# Altium PCB 1551KBK.PcbDoc
Units mm, origin at the board's own origin, x right, y up, seen from the top; angles counter-clockwise.
Board outline 61.5 x 34 mm, 2 copper layers (Top Layer, Bottom Layer); 34 components, 27 nets, 115 pads, 58 vias.
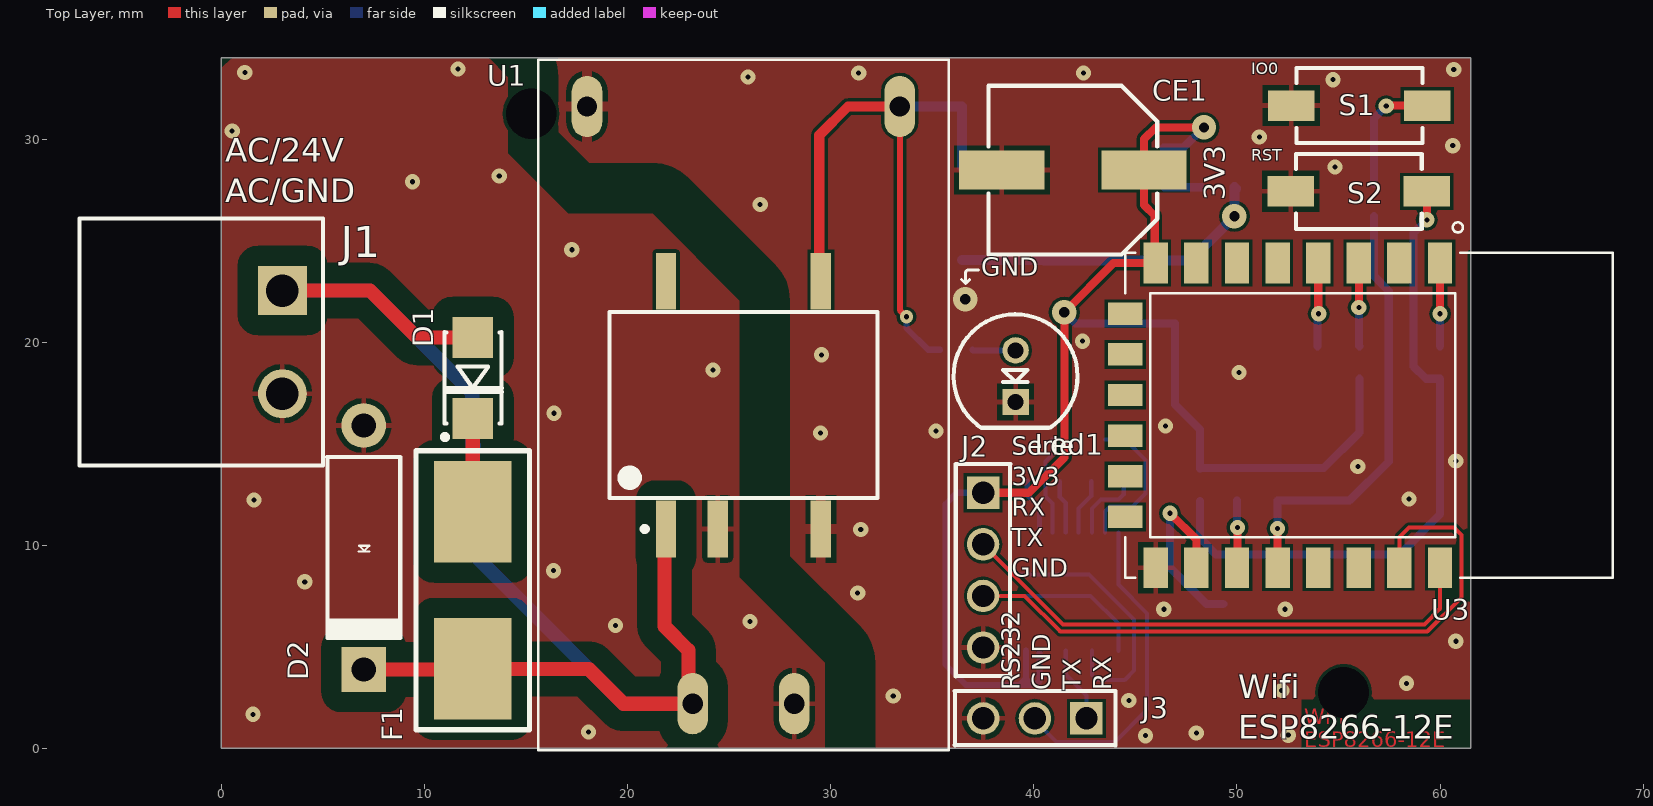
[diagram p0: Top Layer view]
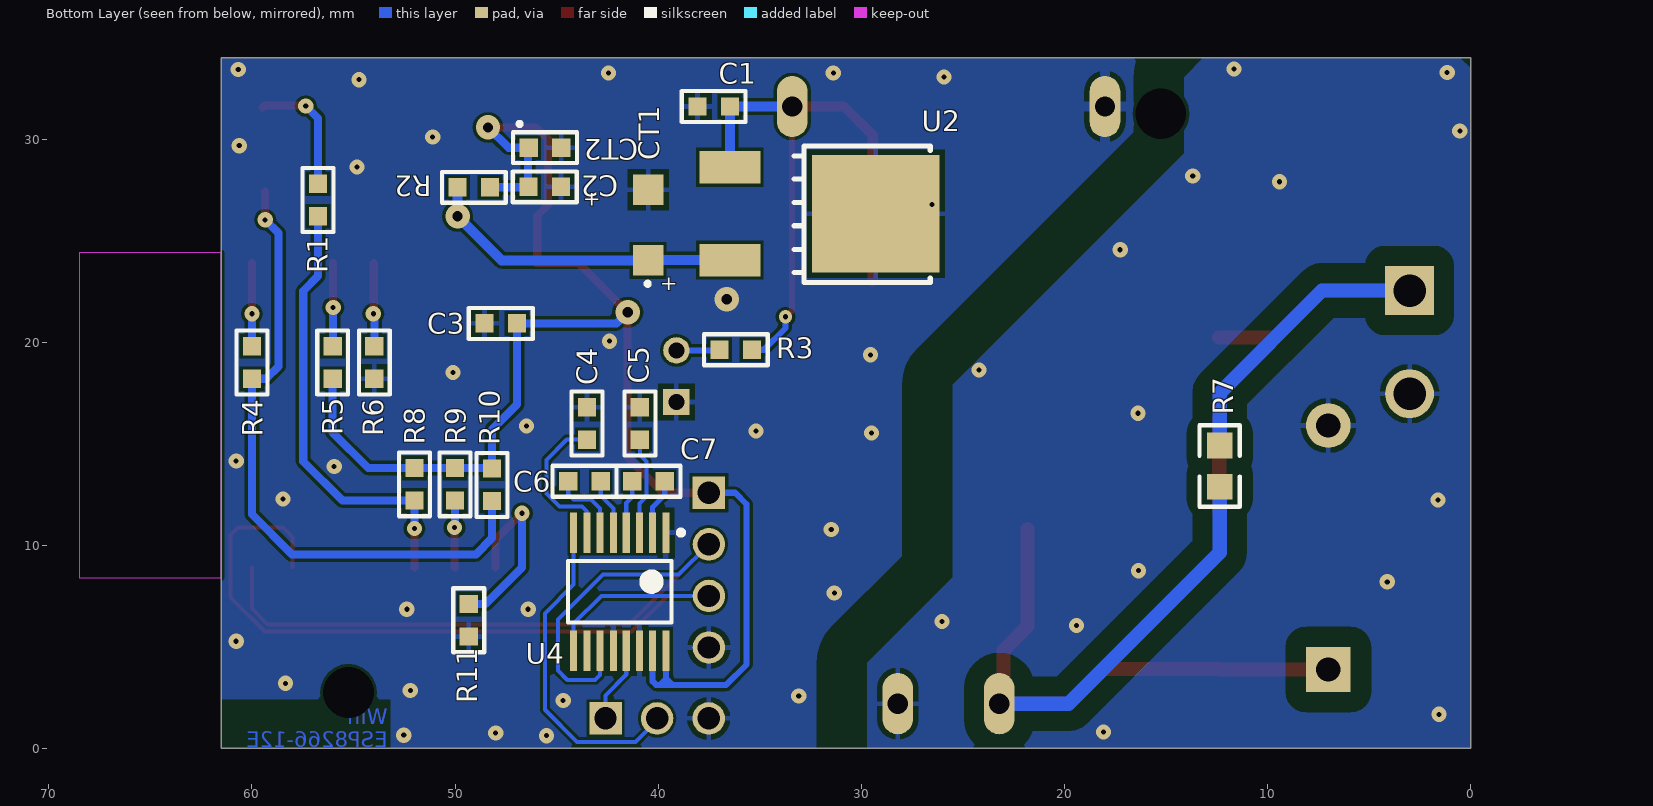
[diagram p1: Bottom Layer view, seen from below]
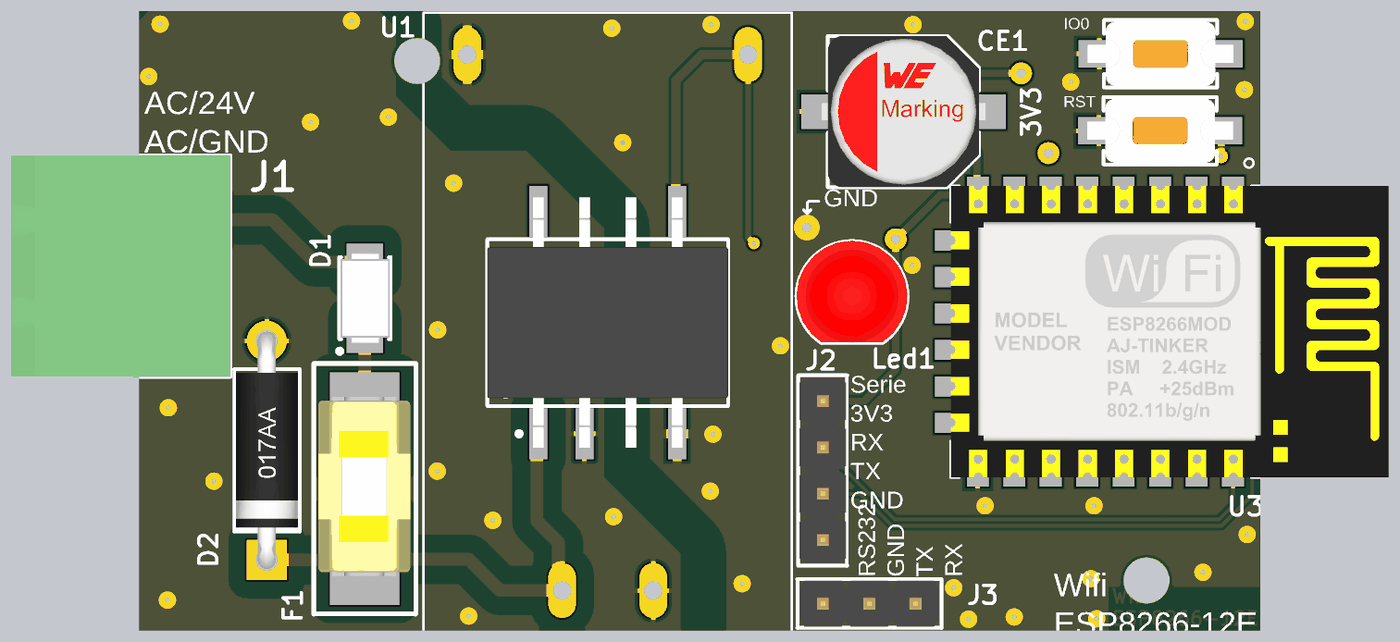
[diagram p2: 3D render of the assembled board from above, using the file's embedded part models]
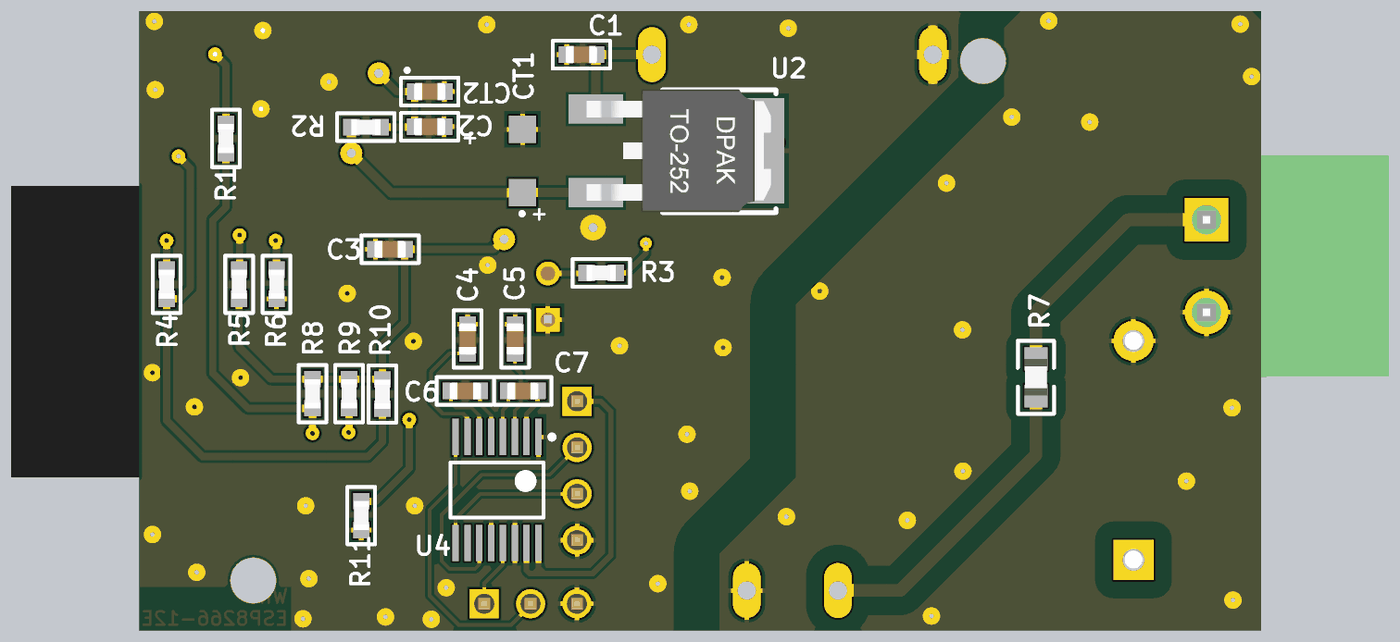
[diagram p3: 3D render of the assembled board from below, using the file's embedded part models]

## Layer stack, top to bottom
Top Solder: solder mask 0.0102, Solder Resist, Dk 3.5
Top Layer: signal copper 0.0356
Dielectric 1: dielectric 0.32, FR-4, Dk 4.8
Bottom Layer: signal copper 0.0356
Bottom Solder: solder mask 0.0102, Solder Resist, Dk 3.5

## Board outline
0,0 61.5,0 61.5,34 0,34

## Design rules (kind name [scope] priority, off if disabled: settings)
Clearance Clearance_GND [InNet('NetD2_A') vs InNet('GND')] p1: gap=2.5 ignorepadtopadclearanceinfootprint=FALSE
Clearance Vin_clearence [(InNet('NetD1_A')OR InNet('NetD1_C') OR InNet('NetD2_C')) vs InNet('NetD2_A')] p2: gap=1 ignorepadtopadclearanceinfootprint=FALSE
Clearance [All] p3: gap=0.15 ignorepadtopadclearanceinfootprint=FALSE
ComponentClearance [All] p1: gap=0 collisioncheckmode=3 verticalgap=0.254 showdistances=FALSE
HoleToHoleClearance [All] p1: gap=0.05 allowstackedmicrovias=TRUE
MinimumSolderMaskSliver [All] p1: minsoldermaskwidth=0.05
PlaneConnect [All] p1: pad.planeconnectstyle=Relief pad.reliefexpansion=0.508 pad.reliefentries=4 pad.reliefconductorwidth=0.254 pad.reliefairgap=0.254 via.planeconnectstyle=Direct via.reliefexpansion=0.508 via.reliefentries=4 via.reliefconductorwidth=0.254 via.reliefairgap=0.254
PolygonConnect PolygonConnect_1 [InComponent('U1') vs InNet('GND')] p1: connectstyle=Relief reliefconductorwidth=0.5 reliefentries=4 polygonreliefangle="90 Angle" airgapwidth=0.254
PolygonConnect [All] p2: thpad.connectstyle=Relief thpad.reliefconductorwidth=0.254 thpad.reliefentries=4 thpad.polygonreliefangle="90 Angle" thpad.airgapwidth=0.254 smdpad.connectstyle=Relief smdpad.reliefconductorwidth=0.254 smdpad.reliefentries=4 smdpad.polygonreliefangle="90 Angle" smdpad.airgapwidth=0.254 via.connectstyle=Direct via.reliefconductorwidth=0.254 via.reliefentries=4 via.polygonreliefangle="90 Angle" via.airgapwidth=0.254
RoomDefinition Supply [InComponentClass('Supply')] p1: confinementstyle=ConfineIn formatcopy=TRUE lockcomponents=FALSE outline -7.975,-4.8 71.475,-4.8 71.475,38.075 -7.975,38.075
RoomDefinition RS232 [InComponentClass('RS232')] p2: confinementstyle=ConfineIn formatcopy=TRUE lockcomponents=FALSE outline -7.975,-4.8 70.75,-4.8 70.75,38.975 -7.975,38.975
RoomDefinition "ESP 12E/F" [InComponentClass('ESP 12E/F')] p3: confinementstyle=ConfineIn formatcopy=TRUE lockcomponents=FALSE outline -7.975,-4.8 70.125,-4.8 70.125,40.025 -7.975,40.025
RoutingVias [All] p1: holewidth=0.4 width=1 viastyle="Through Hole" minholewidth=0.25 minwidth=0.6 maxholewidth=1.5 maxwidth=5
SilkToSilkClearance [All] p1: silktosilkclearance=0
SilkToSolderMaskClearance [IsPad] p1: minsilkscreentomaskgap=0 clearancetoexposedcopper=TRUE
SolderMaskExpansion [All] p1: expansion=0.102
Width [All] p1: maxlimit=1.5 minlimit=0.15 preferedwidth=0.2 minimp=50.000000 maximp=50.000000 favimp=50.000000
24 further rules are at their usual default settings.

## Classes and differential pairs
component class Supply: C1 CT1 D1 D2 F1 J1 Led1 R2 R3 R7 U1 U2
component class RS232: C3 C4 C5 C6 C7 J2 J3 U4
component class "ESP 12E/F": C2 CE1 CT2 R1 R4 R5 R6 R8 R9 R10 R11 S1 S2 U3

## Components (designator, comment, footprint, x,y, rotation, side; value= is the part's Value field where it differs from the comment)
C1 "Ceramic Capacitor" 0603C 37.265,31.6 r270 bottom value=0.1uF
C2 "Ceramic Capacitor" 0603C 45.585,27.65 r90 bottom value=0.1uF (schematic designator C7)
C3 "Ceramic Capacitor" 0603C 47.75,20.925 r270 bottom value=0.1uF (schematic designator C6)
C4 "Ceramic Capacitor" 0603C 43.5,16 r0 bottom value=0.1uF (schematic designator C5)
C5 "Ceramic Capacitor" 0603C 40.9,16 r0 bottom value=0.1uF (schematic designator C4)
C6 "Ceramic Capacitor" 0603C 43.625,13.15 r270 bottom value=0.1uF (schematic designator C3)
C7 "Ceramic Capacitor" 0603C 40.475,13.15 r270 bottom value=0.1uF (schematic designator C2)
CE1 "Eletrolitic Capacitor" WCAP-AS5H_8x10.5 41.925,28.475 r0 top value=1000uF
CT1 "Tantalum capacitor" 1206T 40.491,25.775 r90 bottom value=2.2uF
CT2 "Tantalum capacitor" 0603T 45.575,29.575 r90 bottom value=1uF
D1 "DNP" DO-214AC 12.375,18.25 r90 top value=BYG21M
D2 "DNP" 1N5359BG 7,9.9 r90 top value=1N
F1 "DNP" Fuseholder154 12.375,7.9 r270 top value=0154.V24.0.315A
J1 "Conector" 691313510002 -1,20 r270 top
J2 "Conector" 61300411121 37.5,8.775 r270 top value=4
J3 "Conector" 61300311121 40.05,1.475 r180 top value=3
Led1 "Led" LED_5MM_RED_1C-2A 39.1,18.325 r270 top
R1 "Res" 0603 56.75,27 r0 bottom value=470R (schematic designator R9)
R2 "Res" 0603 49.075,27.625 r90 bottom value=0R1
R3 "Res" 0603 36.175,19.625 r90 bottom value=470R
R4 "Res" 0603 60,19 r0 bottom value=470R (schematic designator R5)
R5 "Res" 0603 56.025,19 r0 bottom value=10k (schematic designator R6)
R6 "Res" 0603 53.975,19 r180 bottom value=10k (schematic designator R10)
R7 "Res" 0805 12.35,13.9 r180 bottom value=0R0 (schematic designator R1)
R8 "Res" 0603 52,13 r180 bottom value=10k (schematic designator R7)
R9 "Res" 0603 50,13 r180 bottom value=10k (schematic designator R8)
R10 "Res" 0603 48.175,12.975 r0 bottom value=10k (schematic designator R4)
R11 "Res" 0603 49.327,6.309 r0 bottom value=10k
S1 "Swich" 434121043816 56.025,31.65 r0 top value=434121043816 (schematic designator S2)
S2 "Swich" 434121043816 56,27.425 r0 top value=434121043816 (schematic designator S1)
U1 "HLK-PM01" HLK-PM01/ISE 25.7,16.9 r90 top
U2 "LDO" "DPAK-TO-252-3, CASE369C" 32.875,26.325 r0 bottom value=LF33ABDT-TR
U3 "ESP8266-12E/ESP-12E" XCVR_ESP8266-12E/ESP-12E 53,16.4 r270 top (schematic designator U4)
U4 "RS232 Serie CI" TI-PW16_M 41.875,7.7 r270 bottom value=MAX3221IPW (schematic designator U3)

## Footprints (in the part's own frame and the unit in brackets; to place one, negate y for a bottom-side part, rotate by r counter-clockwise, add the part's x,y. Pads: shape width x height; smd on the part's side, far side on the other; paste and mask are expansions set on the pad)
1N5359BG [mm] "Dip zener Diode"
  round 2.2 hole 1.2: A(5.994,0)
  rect 2.2x2.2 hole 1.2: C(-6.02,0)
  silkscreen extent -4.56,-1.82 4.44,1.8, body extent -6.5,-1.7 6.5,1.7, height 3.5
0603 [mm] "Resistencia"
  rect 0.9x0.9 smd: 1(0,0.8) 2(0,-0.8)
  silkscreen extent -0.76,-1.57 0.76,1.57, body extent -0.43,-0.8 0.43,0.8, height 0.48
0603C [mm] "Condensador Ceramico"
  rect 0.9x0.9 smd: 1(0,0.8) 2(0,-0.8)
  silkscreen extent -0.76,-1.57 0.76,1.57, body extent -0.47,-0.88 0.48,0.87, height 0.85
0603T [mm] "Condensador Ceramico"
  rect 0.9x0.9 smd: 1(0,0.8) 2(0,-0.8)
  silkscreen extent -0.76,-1.57 1.27,1.57, body extent -0.47,-0.88 0.48,0.87, height 0.85
0805 [mm]
  rect 1.27x1.27 smd: 1(0,1.016) 2(0,-1.016)
  silkscreen extent -0.99,-2.01 0.99,2.01, body extent -0.63,-1 0.63,1, height 0.43
1206T [mm] "Condensador Tantalum"
  rect 1.5x1.5 smd: 1(-1.753,0) 2(1.727,0)
  silkscreen extent -3,-0.07 -2.8,0.13, body extent -1.6,-0.91 1.6,0.89, height 1.2
61300311121 [mm] "Pin Header, pitch 2.54 mm, THT, Vertical, single row, 3p"
  rect 1.6x1.6 hole 1.1: 1(-2.54,0)
  round 1.6 hole 1.1: 2(0,0) 3(2.54,0)
  silkscreen extent -3.96,-1.35 3.96,1.34, body extent -3.81,-1.27 3.81,1.27, height 8.57
61300411121 [mm] "Pin Header, pitch 2.54 mm, THT, Vertical, single row, 4p"
  rect 1.6x1.6 hole 1.1: 1(-3.81,0)
  round 1.6 hole 1.1: 2(-1.27,0) 3(1.27,0) 4(3.81,0)
  silkscreen extent -5.23,-1.35 5.23,1.34, body extent -5.08,-1.27 5.08,1.27, height 8.57
434121043816 [mm] "SMD Tact Switch, body 6x3.5mm"
  rect 2.3x1.5 smd: 1(-3.35,0) 2(3.35,0)
  silkscreen extent -3.1,-1.85 3.1,1.85, body extent -4,-1.75 4,1.75, height 4.3
691313510002 [mm] "5,08mm - PCB Headers - Horizontal - Closed ends - 02p"
  rect 2.4x2.4 hole 1.6: 1(-2.54,4)
  round 2.4 hole 1.6: 2(2.54,4)
  silkscreen extent -6.08,-6 6.08,6, body extent -6.08,-6 6.08,6, height 8.55
DO-214AC [mm] "BYG21M, STPS1L30A"
  rect 2x2 smd: A(1.981,0) C(-2.007,0)
  silkscreen extent -3.05,-1.42 2.24,1.5, body extent -2.51,-1.37 2.49,1.33, height 2.15
"DPAK-TO-252-3, CASE369C" [mm] "LP295_CASE369C"
  rect 3x1.6 smd mask+0: 1(3.59,-2.286) 3(3.59,2.286)
  rect 6.3x5.8 smd mask+0: 2(-3.59,0)
  silkscreen extent -6.28,-3.34 0.42,3.39, body extent -6,-3.37 4.1,3.37, height 2.42
Fuseholder154 [mm] "LITTELFUSE - Fuse With Holder - Molded Base Type 154 Series"
  rect 5x3.81 smd: 1(-3.759,0) 2(3.988,0)
  silkscreen extent -6.76,-2.79 6.99,2.79, body extent -4.93,-2.54 4.9,2.49, height 3.81
HLK-PM01/ISE [mm]
  oval 3.016x1.508 hole 1: 1(-14.7,2.5) 2(-14.7,-2.5) 3(14.7,7.7) 4(14.7,-7.7)
  rect 2.8x1 smd: 1(-6.1,3.81) 2(-6.1,1.27) 3(-6.1,-3.81) 4(6.1,-3.81) 8(6.1,3.81)
  silkscreen extent -17,-10.1 17,10.1, body extent -6.88,-6.6 6.88,6.6, height 7
LED_5MM_RED_1C-2A [mm] "LED, Red, Body Dia. 5.08mm, Pin spacing 2.54mm"
  round 1.3 hole 0.8: A(-1.27,0)
  rect 1.3x1.3 hole 0.8: C(1.27,0)
  silkscreen extent -3.05,-3.05 2.56,3.05, body extent -3.08,-3.05 2.51,3.05, height 14.35
TI-PW16_M [mm] "TSOP, 16-Leads, Body 5x4.4mm, Pitch 0.65mm, IPC Low Density"
  rect 2x0.35 smd: 1(-2.921,2.261) 2(-2.921,1.6) 3(-2.921,0.965) 4(-2.921,0.305) 5(-2.921,-0.33) 6(-2.921,-0.991) 7(-2.921,-1.626) 8(-2.921,-2.286) 9(2.896,-2.286) 10(2.896,-1.626) 11(2.896,-0.991) 12(2.896,-0.33) 13(2.896,0.305) 14(2.896,0.965) 15(2.896,1.6) 16(2.896,2.261)
  silkscreen extent -3.05,-2.57 1.5,3.12, body extent -2.26,-2.56 2.24,2.54, height 1.2
WCAP-AS5H_8x10.5 [mm] "Aluminum Electrolytic Capacitors, 8x10.5mm"
  rect 4.2x1.9 smd: 1(3.5,0) 2(-3.5,0)
  silkscreen extent -4.15,-4.15 4.15,4.15, body extent -4.5,-4.15 4.5,4.15, height 10.5
XCVR_ESP8266-12E/ESP-12E [mm]
  rect 2x1.2 smd: 1(-7.5,7) 2(-7.5,5) 3(-7.5,3) 4(-7.5,1) 5(-7.5,-1) 6(-7.5,-3) 7(-7.5,-5) 8(-7.5,-7) 15(7.5,-7) 16(7.5,-5) 17(7.5,-3) 18(7.5,-1) 19(7.5,1) 20(7.5,3) 21(7.5,5) 22(7.5,7)
  rect 1.1x1.7 smd: 9(-5,-8.5) 10(-3,-8.5) 11(-1,-8.5) 12(1,-8.5) 13(3,-8.5) 14(5,-8.5)
  Keep-Out Layer region: 8,8.51 -8.009,8.51 -8.009,15.5 8,15.5
  Keep-Out Layer region: 8,8.51 -8.009,8.51 -8.009,15.5 8,15.5
  silkscreen extent -9.5,-8.5 8,15.5, body extent -8.01,-8.48 8,15.53, height 2.65

## Part data
C1 C2 C3 C4 C5 C6 C7: library part CC
CE1: library part CE, notas=MCVVT6R3M102FB3L
CT1 CT2: library part CT, "Condensador Tantalum"
  CT2: notas=TMCJ1C105MTRF
D1: library part Diode, "Diode", notas=24Vin
D2: library part "Zener Diode", "Zener Diode"
F1: library part Fusivel_LITTELFUSE_0154, "Fusivel SMD LITTELFUSE  0154", notas=24Vin
J1: library part "Conector 2 pins", "Conector 2 pins"
J2: library part "Conector 4 pins", "Conector 4 pins"
J3: library part "Conector 3 pins", "Conector 3 pins"
S1 S2: library part "switch 2 patas smd", "6x3.5mm SMD WS-TASV, height 4.3 mm, 160 gf"
U1: "HI-LINK Ultra-compact power module HLK-PM01<p> <ul> <li>Meet UL, CE requirements</li> <li>Ultra-thin, ultra-small</li> <li>All voltage input (AC: 90 ~ 264V)</li> <li>Low ripple and low noise</li> <li>Output overload and short circuit protection</li> <li>High efficiency, high power density</li> <li>The product is designed to meet the requirements of EMC and Safety Test</li> <li>Low power consumption, environmental protection, no-load loss <0.1W</li> <li>100% load aging and testing</li>", Package="Package Analog Devices", Availability=Unavailable, MF=Hi-link, MP=hlk-pm01, Price=None, SnapEDA_Link=https://www.snapeda.com/parts/hlk-pm01/Hi-link/view-part/2875605/?ref=snap
U2: library part LF33ABDT-TR, "ST, LF33ABDT-TR, Fixed LDO Voltage Regulator, 3V to 16V, 400mV Dropout, 3.3Vout, 0.5Aout, TO-252-3", Dropout Voltage Vdo=400, Input Voltage Max=16, Input Voltage Min=3, LDO Regulator Case Style=TO-252, Manufacturer=STMICROELECTRONICS, Operating Temperature Max=125, Operating Temperature Min=-40, Operating Temperature Range="-40°C to +125", Operating Voltage Tolerance +=2%, Output Current=0.5, Output Voltage Nom.=3.3, Primary Input Voltage=5.3, Supplier Part Number 1=1087183, Supply Voltage Min=4.3, Voltage Regulator Type="Fixed<!--FANDB--><div class=\"features-and-benefits-container\"><div class=\"features-and-benefits-description\"><span class=\"features-benefits-value\">The LF33ABDT-TR is a Low-drop Voltage Regulator with inhibit function and 3.3V output voltage. Low quiescent current make it particularly suitable for low-noise, low power applications and especially in battery powered systems. In the 5-pin configuration (PPAK) a shutdown logic control function is available (pin 2, TTL compatible). This means that when the device is used as a local regulator, a part of the board can be put in standby, decreasing the total power consumption. In the 3-terminal configuration, the device has the same electrical performance, but it is fixed in ON state. It requires a capacitor of only 2.2µF for stability, saving board space and costs.</span></div><div class=\"features-and-benefits-list\"><ul class=\"features-and-benefits-list-list\"><li class=\"features-and-benefits-list-item\">Very low drop-out voltage (0.45V)</li><li class=\"features-and-benefits-list-item\">Very low quiescent current (typical 50µA in OFF mode, 500µA in ON mode)</li><li class=\"features-and-benefits-list-item\">500mA Output current</li><li class=\"features-and-benefits-list-item\">Logic-controlled electronic shutdown</li><li class=\"features-and-benefits-list-item\">Internal current and thermal limit</li><li class=\"features-and-benefits-list-item\">Available in ±1% (AB) or ±2% (C) selection at 25°C</li><li class=\"features-and-benefits-list-item\">80", Accuracy %=1%, Base Number=33, ComponentLink1Description=http://www.farnell.com/datasheets/1902868.pdf, ComponentLink1URL=http://www.farnell.com/datasheets/1902868.pdf, Manufacturer Part Number=LF33ABDT-TR, MSL=-, No. of Outputs=1, No. of Pins=3, Packaging="Cut Tape", Pricing 1="1=0,52, 70=0,33, 200=0,297, 750=0,264, 1250=0,25 (EUR)", RoHS=YES, Stock 1=7182, Supplier 1=Farnell, Supply Voltage Max=16, SVHC="No SVHC (15-Jun-2015)", Termination Type=SMD
U3: "This WiFi module has a 32-bit MCU micro and clock speeds supporting 80 MHz or 160 MHz. Supports the RTOS and integrated Wi-Fi MAC/BB/RF/PA/LNA, and has an on-board antenna.", Package=None, Availability=Unavailable, MF=AI-Thinker, MP=ESP8266-12E/ESP-12E, Price=None, SnapEDA_Link=https://www.snapeda.com/parts/ESP8266-12E/ESP-12E/AI-Thinker/view-part/106414/?ref=snap
U4: library part MAX3221IPW, "3-V to 5.5-V Single-Channel RS-232 Line Driver / Receiver with ±15-kV ESD Protection, -40 to 85 degC, 16-Pin TSSOP (PW), Green (RoHS & no Sb/Br)", Drivers Per Package=1, Supply Voltage(s)(V)="3.3 or 5.0", ComponentLink1Description="Manufacturer URL", ComponentLink1URL=www.ti.com, ComponentLink2Description=Datasheet, ComponentLink2URL=http://www.ti.com/general/docs/lit/getliterature.tsp?genericPartNumber=MAX3221&fileType=pdf, ComponentLink3Description="Package Specification", ComponentLink3URL=http://www.ti.com/litv/pdf/mpds361, DatasheetVersion=SLLS348M, ESD HBM(kV)=+/-15, ICC(Max)(mA)=1, PackageDescription="16-Pin Plastic Thin Small Outline Package 5 x 4.4 mm Body ,0.65 mm Pitch", PackageReference=PW16, PackageVersion="revG, Feb-2011", PartNumber=MAX3221IPW, Receivers Per Package=1, RS-232=TRUE, Single Supply=TRUE, SubFamily=RS-232
R7: notas=AC

## Free pads (board coordinates)
  round 1.524 hole 2.5: NA(15.25,31.25) NA(55.25,2.75)

## Via types
v1: diameter 0.75, hole 0.25, Top Layer to Bottom Layer, 53 vias
v2: diameter 1.2, hole 0.5, Top Layer to Bottom Layer, 4 vias
v3: diameter 0.65, hole 0.25, Top Layer to Bottom Layer, 1 vias

## Nets (pads, with @x,y where several pads share a name; then routed paths per layer and width w, separated by ;. In a path a pad name is that pad's centre, name@x,y a point inside that pad or via, vN(x,y) a via of type N, cw(c..) or ccw(c..) an arc to the next point about the centre after c; other vN are vias at no path point)
3V3: C2.1 C3.1 CE1.1 CT2.1 J2.1 R2.2 R5.1 R8.1 R9.1 R10.2 U3.8 U4.15 U4.16 | length 76.2
  Top Layer w0.4: J2.1 39.76,12.585 41.5,14.325 v2(41.5,21.475) 43.925,23.9 U3.8 45.95,23.95 45.95,26.225 45.425,26.75 CE1.1 45.425,30 46,30.575 v2(48.375,30.575)
  Bottom Layer w0.3: J2.1 36.21,12.585 35.65,12.025 35.65,4.125 36.65,3.125 40.1,3.125 40.275,3.3 U4.15 ; 39.614,3.139 U4.16
  Bottom Layer w0.4: v2@41.288,21.475 v2(41.5,21.475) 42.05,20.925 C3.1 46.95,16.925 48.175,15.7 R10.2 48.2,13.8 R9.1 R8.1 54.275,13.8 56.025,15.55 R5.1 ; R2.2 46.41,27.625 46.41,29.54 CT2.1 47.375,29.575 v2(48.375,30.575)
GND: C1.2 C2.2 C3.2 C4.2 C5.2 CE1.2 CT1.2 CT2.2 J2.4 J3.3 Led1.C R6.2 R11.1 S1.1 S2.1 U1.3 U2.2 U3.15 U4.1 U4.12 U4.14
  other v1: 45.491,0.623 52.525,0.65 48,0.75 44.675,2.35 33.075,2.575 52.2,2.85 58.35,3.2 60.775,5.275 46.4,6.85 52.375,6.85 31.325,7.65 31.475,10.775 58.475,12.275 55.95,13.875 60.775,14.15 29.5,15.525 35.175,15.625 46.475,15.875 50.1,18.5 29.55,19.375 42.4,20.05 26.525,26.775 54.825,28.625 60.625,29.675 51.1,30.1 54.725,32.925 25.925,33.05 31.375,33.25 42.45,33.25 60.675,33.425
  other v2: 36.625,22.112
NetC1_1: C1.1 R3.2 U1.4 U2.1 | length 30.9
  Top Layer w0.3: U1.4@33.4,31.6 33.4,21.575 v3(33.725,21.25)
  Top Layer w0.5: U1.4@29.435,23 29.435,30.185 30.85,31.6 U1.4@33.4,31.6
  Bottom Layer w0.3: v3(33.725,21.25) 33.725,20.698 34.798,19.625 R3.2
  Bottom Layer w0.5: U1.4@33.4,31.6 C1.1 U2.1
NetC4_1: C4.1 U4.7 | length 7.5
  Bottom Layer w0.2: U4.7 43.501,11.651 43.75,11.9 44.85,11.9 45.5,12.55 45.5,14.2 44.5,15.2 C4.1
NetC5_1: C5.1 U4.3 | length 4.9
  Bottom Layer w0.2: C5.1 40.9,14.45 40.575,14.125 40.575,12.4 40.91,12.065 U4.3
NetC6_1: C6.1 U4.5 | length 2.8
  Bottom Layer w0.2: U4.5 42.205,11.805 42.825,12.425 C6.1
NetC6_2: C6.2 U4.6 | length 3.7
  Bottom Layer w0.2: U4.6 42.866,11.816 43.3,12.25 44.175,12.25 44.425,12.5 C6.2
NetC7_1: C7.1 U4.2 | length 2.8
  Bottom Layer w0.25: C7.1 39.675,12.475 40.275,11.875 U4.2
NetC7_2: C7.2 U4.4 | length 2.7
  Bottom Layer w0.2: C7.2 41.275,12.375 41.57,12.08 U4.4
NetCT1_1: CT1.1 R2.1 U2.3 | length 16.2
  Bottom Layer w0.5: U2.3 40.474,24.039 CT1.1 47.699,24.022 v2(49.875,26.198) R2.1 49.95,27.55 R2.1@49.927,27.527 ; v2@49.927,25.902 v2@49.927,26.198
NetD1_A: D1.A J1.1 R7.1 | length 24.4
  Top Layer w0.7: J1.1 7.31,22.54 9.625,20.225 12.369,20.225 D1.A
  Bottom Layer w0.7: J1.1 7.31,22.54 12.35,17.5 12.35,14.991 R7.1@12.425,14.916
NetD1_C: D1.C F1.1 | length 4.6
  Top Layer w0.7: F1.1 D1.C
NetD2_A: D2.A J1.2 U1.2
  other v1: 18.075,0.8 1.55,1.675 19.4,6.05 26.025,6.25 4.1,8.2 16.35,8.75 1.6,12.225 16.375,16.5 24.2,18.625 17.25,24.55 9.4,27.9 13.675,28.175 0.525,30.4 1.15,33.275 11.65,33.45
NetD2_C: D2.C F1.2 R7.2 U1.1 | length 42.9
  Top Layer w0.7: D2.C 12.343,3.88 F1.2 18.088,3.912 19.8,2.2 23,2.2 23,4.825 21.815,6.01 U1.1@21.815,10.8
  Bottom Layer w0.7: R7.2 12.35,9.65 19.8,2.2 U1.1@23.125,2.2
NetLed1_A: Led1.A R3.1 | length 2.1
  Bottom Layer w0.3: R3.1 37.005,19.595 Led1.A
NetR1_1: R1.1 R8.2 U3.18 | length 21.9
  Top Layer w0.4: U3.18 v1(52,10.825)
  Bottom Layer w0.4: v1(52,10.825) R8.2 55.55,12.2 57.475,14.125 57.475,22.525 56.75,23.25 R1.1
NetR1_2: R1.2 S1.2 | length 6.3
  Top Layer w0.4: v1(57.35,31.625) 57.375,31.65 S1.2 S1.2@59.475,31.55
  Bottom Layer w0.4: R1.2 56.75,31.025 v1(57.35,31.625)
NetR4_2: R4.2 U3.1 | length 4.1
  Top Layer w0.4: v1(60,21.4) U3.1
  Bottom Layer w0.4: R4.2 v1(60,21.4)
NetR5_2: R5.2 U3.3 | length 4.1
  Top Layer w0.4: v1(56,21.7) U3.3
  Bottom Layer w0.4: v1(56,21.7) 56,19.825 R5.2
NetR6_1: R6.1 U3.4 | length 4.2
  Top Layer w0.4: U3.4 54,21.425 v1(54.025,21.4)
  Bottom Layer w0.4: R6.1 53.975,21.4 v1(54.025,21.4)
NetR9_2: R9.2 U3.17 | length 3.3
  Top Layer w0.4: U3.17 50.025,8.925 v1(50.025,10.875)
  Bottom Layer w0.4: R9.2 50,10.95 49.975,10.925 v1(50.025,10.875)
NetR11_2: R11.2 U3.16 | length 9.3
  Top Layer w0.4: v1(46.7,11.575) 48,10.275 U3.16
  Bottom Layer w0.4: v1(46.7,11.575) 46.7,8.9 48.5,7.1 49.318,7.1 R11.2
RS232_Rx: J3.2 U4.8 | length 16
  Bottom Layer w0.2: J3.2 40.05,1.375 41.104,0.321 43.996,0.321 45.575,1.9 45.575,6.65 44.161,8.064 U4.8
RS232_Tx: J3.1 U4.13 | length 3.8
  Bottom Layer w0.2: U4.13 41.57,3.63 42.59,2.61 J3.1
Rx: J2.3 U3.21 U4.9 | length 41.5
  Top Layer w0.2: J2.3 39.545,7.505 41.3,5.75 59.37,5.75 61.05,7.43 61.05,10.5 60.675,10.875 58.475,10.875 58,10.4 U3.21
  Bottom Layer w0.2: J2.3 42.795,7.505 44.161,6.139 U4.9
Tx: J2.2 U3.22 U4.11 | length 41.5
  Top Layer w0.2: J2.2 41.445,6.1 59.225,6.1 60,6.875 U3.22
  Bottom Layer w0.2: J2.2 38.995,8.55 42.725,8.55 44.925,6.35 44.925,3.825 44.475,3.375 43.1,3.375 42.866,3.609 U4.11
VCC: R4.1 R10.1 S2.2 | length 31.9
  Top Layer w0.4: v1(59.35,26.025) S2.2
  Bottom Layer w0.4: R10.1 48.175,10.35 48.975,9.55 58.025,9.55 60,11.525 R4.1 59.3,18.2 58.7,18.8 58.7,25.375 v1(59.35,26.025)
pads on no net: U1.8 U3.2 U3.5 U3.6 U3.7 U3.9 U3.10 U3.11 U3.12 U3.13 U3.14 U3.19 U3.20 U4.10

## Polygon pours and split planes (outlines as drawn)
NetD2_A on Top Layer "GND_IN" (solid, remove dead copper, pour order 0): 0,33.475 0,0 29.7,0 29.7,4.225 25.5,8.425 25.5,22.05 21.225,26.325 17.075,26.325 14.1,29.3 14.1,33.05 13.125,34.025 0.55,34.025
GND on Top Layer "GND" (solid, remove dead copper, pour order 2): 16.025,34 16.025,27.65 16.5,27.175 21.8,27.175 26.75,22.225 26.75,8.775 29.7,5.825 29.7,0 60.8,0 61.475,0.675 61.475,34
NetD2_A on Bottom Layer "GND_IN" (solid, remove dead copper, pour order 4): 0,33.475 0,0 29.7,0 29.7,4.225 25.5,8.425 25.5,17.9 17.075,26.325 14.1,29.3 14.1,33.05 13.125,34.025 0.55,34.025
GND on Bottom Layer "GND" (solid, remove dead copper, pour order 6): 16.025,34 16.025,27.65 16.5,27.175 19.75,27.175 26.75,20.175 26.75,8.775 29.7,5.825 29.7,0 60.8,0 61.475,0.675 61.475,34

## Other copper
Top Layer:
  text "Wifi / ESP8266-12E" at 53.325,0.05 h0.75
Bottom Layer:
  region net 3V3: 39.1,3.125 40.1,3.125 39.6,3.625
  text "Wifi / ESP8266-12E" at 53.325,0.05 h0.75

## Silkscreen, mask and mechanical layers (free items; w line width, h text height)
Top Overlay:
  lines w0.15: 36.439,23.089 36.639,22.889 ; 36.839,23.089 36.639,22.889 ; 37.275,23.55 36.725,23.55 36.639,23.464 36.639,22.889
  text "IO0" at 50.7,33 h1
  text "RST" at 50.7,28.725 h1
  text "3V3" at 49.4,26.975 h1 r90
  text "AC/24V / AC/GND" at 0.175,26.5 h2
  text "GND" at 37.4,22.975 h1.52
  text "Serie / 3V3 / RX / TX / GND" at 38.9,8.15 h1.5
  text "RS232 / GND / TX / RX" at 44.1,2.85 h1.5 r90
  text "Wifi / ESP8266-12E" at 50.071,0.075 h2
Bottom Overlay:
  text "+" at 42.825,26.725 h0.75
  text "+" at 39.025,22.55 h0.75
Mechanical 1:
  the board outline again, w0.254